# Altium PCB BAILEY.PcbDoc (part 7 of 8)
Units mil, origin at the board's own origin, x right, y up, seen from the top; angles counter-clockwise.
Board outline 4500 x 4000 mil, 4 copper layers (Signal Layer 1, Signal Layer 2, Signal Layer 3, Signal Layer 4), stack 59.904 mil thick; 190 components, 117 nets, 664 pads, 291 vias.
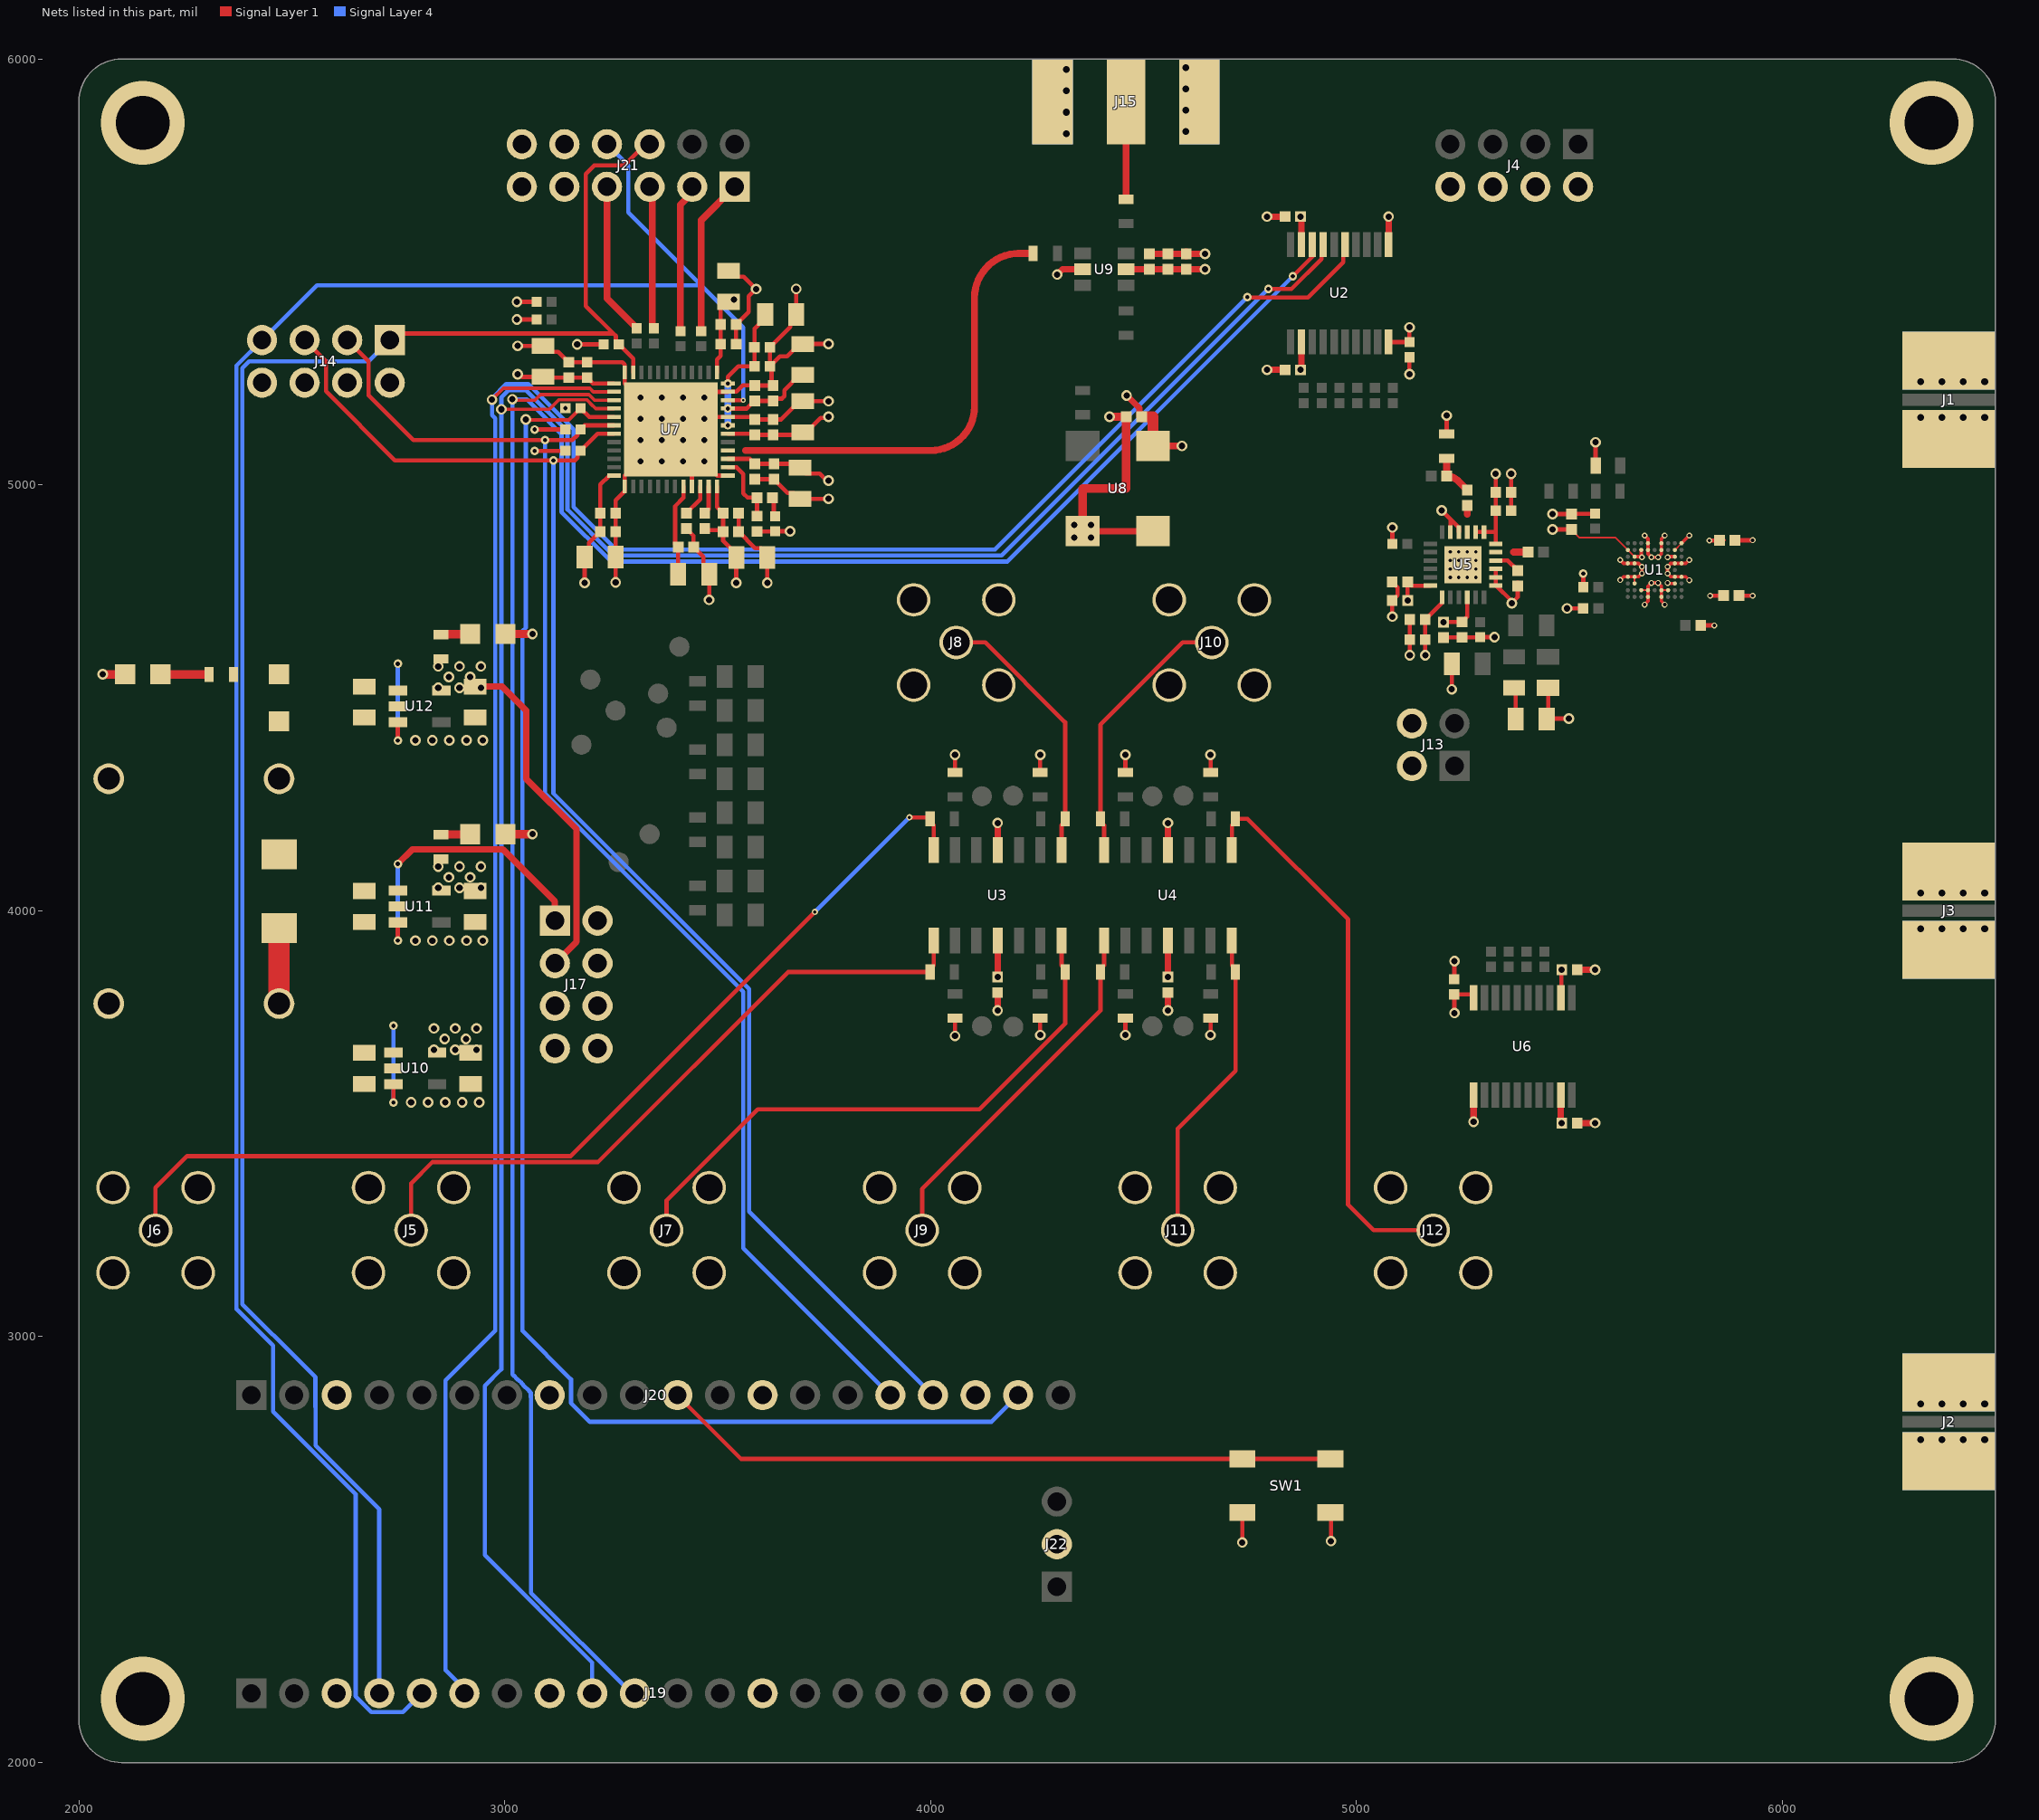
[diagram p4: the nets of this part, all layers, seen from the top]

## Part data (continued)
U11: "1-A, low-IQ high-accuracy low-dropout (LDO) voltage regulator with enable 5-SOT-23 -40 to 125", Case/Package=SOT-23, Dropout Voltage=650mV, Manufacturer="Texas Instruments", Manufacturer Lifecycle Status=ACTIVE, Max Junction Temperature (Tj)=125°C, Max Supply Voltage=5.5V, Min Operating Temperature=-40°C, Min Supply Voltage=1.45V, Nominal Supply Current=25µA, Output Current="1 A", Output Voltage="1.8 V", Supplier Part Number=296-50413-1-ND, Accuracy=1%, Category="LDO Voltage Regulators", ComponentLink1Description=https://sigma.octopart.com:443/177332311/technical_drawing/Texas-Instruments-TLV75718PDBVR.pdf?src-supplier=Texas+Instruments, ComponentLink1URL=https://sigma.octopart.com:443/177332311/technical_drawing/Texas-Instruments-TLV75718PDBVR.pdf?src-supplier=Texas+Instruments, ComponentLink2Description=https://octopart.com:443/opatz8j6/c1?t=LNhw8VYZlWpvSgfwSbWwER0C1aFrb4WiDbvbIAGvhxvgQJSu-YTHIYusHOkqrFl1ubYiC7hECb41naNFPdUxKtCiz9_QYZXvTPuT2kWWY7P1iaj_9VuZ0VXU-pOF7midcWATfFw5vckxfwAqZx9Q2ej4q7wKDFH9Xtp9E58D2pRmx7nz-A2MSPhDRcBhv6VVNe5pwxWdv5qqQWIE0Ip5EXAq_TZ793t-Km77zPzDy5oRrzSJqtrEGO8Rg9L3KNyczjw3CqQXp4IaldJF9NwqSrhLVRVV24aJWYeWxK7QEZ1zbLdzfLHpUNGWUx5BArHk98TBn7whuhePb0udLY4hessARU-N37P82AGNs8v-R6eVBy-k_l2R0DXlJserTyRNxdjxCkw&src-supplier=Texas+Instruments, ComponentLink2URL=https://octopart.com:443/opatz8j6/c1?t=LNhw8VYZlWpvSgfwSbWwER0C1aFrb4WiDbvbIAGvhxvgQJSu-YTHIYusHOkqrFl1ubYiC7hECb41naNFPdUxKtCiz9_QYZXvTPuT2kWWY7P1iaj_9VuZ0VXU-pOF7midcWATfFw5vckxfwAqZx9Q2ej4q7wKDFH9Xtp9E58D2pRmx7nz-A2MSPhDRcBhv6VVNe5pwxWdv5qqQWIE0Ip5EXAq_TZ793t-Km77zPzDy5oRrzSJqtrEGO8Rg9L3KNyczjw3CqQXp4IaldJF9NwqSrhLVRVV24aJWYeWxK7QEZ1zbLdzfLHpUNGWUx5BArHk98TBn7whuhePb0udLY4hessARU-N37P82AGNs8v-R6eVBy-k_l2R0DXlJserTyRNxdjxCkw&src-supplier=Texas+Instruments, ComponentLink3Description=https://sigma.octopart.com:443/175570406/technical_drawing/Texas-Instruments-TLV75718PDBVR.pdf?src-supplier=Texas+Instruments, ComponentLink3URL=https://sigma.octopart.com:443/175570406/technical_drawing/Texas-Instruments-TLV75718PDBVR.pdf?src-supplier=Texas+Instruments, ComponentLink4Description=https://sigma.octopart.com:443/169406034/technical_drawing/Texas-Instruments-TLV75718PDBVR.pdf?src-supplier=Texas+Instruments, ComponentLink4URL=https://sigma.octopart.com:443/169406034/technical_drawing/Texas-Instruments-TLV75718PDBVR.pdf?src-supplier=Texas+Instruments, ComponentLink5Description=https://sigma.octopart.com:443/155939316/technical_drawing/Texas-Instruments-TLV75718PDBVR.pdf?src-supplier=Texas+Instruments, ComponentLink5URL=https://sigma.octopart.com:443/155939316/technical_drawing/Texas-Instruments-TLV75718PDBVR.pdf?src-supplier=Texas+Instruments, ComponentLink6Description=https://sigma.octopart.com:443/102331370/technical_drawing/Texas-Instruments-TLV75718PDBVR.pdf?src-supplier=Texas+Instruments, ComponentLink6URL=https://sigma.octopart.com:443/102331370/technical_drawing/Texas-Instruments-TLV75718PDBVR.pdf?src-supplier=Texas+Instruments, ComponentLink7Description=https://datasheet.octopart.com:443/TLV75718PDBVR-Texas-Instruments-datasheet-151190461.pdf?src-supplier=Upverter, ComponentLink7URL=https://datasheet.octopart.com:443/TLV75718PDBVR-Texas-Instruments-datasheet-151190461.pdf?src-supplier=Upverter, ComponentLink8Description=https://datasheet.octopart.com:443/TLV75718PDBVR-Texas-Instruments-datasheet-164419132.pdf?src-supplier=Augswan, ComponentLink8URL=https://datasheet.octopart.com:443/TLV75718PDBVR-Texas-Instruments-datasheet-164419132.pdf?src-supplier=Augswan, ComponentLink9Description=https://datasheet.octopart.com:443/TLV75718PDBVR-Texas-Instruments-datasheet-165804641.pdf?src-supplier=LCSC, ComponentLink9URL=https://datasheet.octopart.com:443/TLV75718PDBVR-Texas-Instruments-datasheet-165804641.pdf?src-supplier=LCSC, ComponentLink10Description=https://datasheet.octopart.com:443/TLV75718PDBVR-Texas-Instruments-datasheet-159117837.pdf?src-supplier=LCSC, ComponentLink10URL=https://datasheet.octopart.com:443/TLV75718PDBVR-Texas-Instruments-datasheet-159117837.pdf?src-supplier=LCSC, ComponentLink11Description=http://sigma.octopart.com:80/reach_statement/Texas-Instruments-company-64.pdf?src-supplier=Compliance+Statements, ComponentLink11URL=http://sigma.octopart.com:80/reach_statement/Texas-Instruments-company-64.pdf?src-supplier=Compliance+Statements, ComponentLink12Description=http://sigma.octopart.com:80/conflict_mineral_statement/Texas-Instruments-company-63.pdf?src-supplier=Compliance+Statements, ComponentLink12URL=http://sigma.octopart.com:80/conflict_mineral_statement/Texas-Instruments-company-63.pdf?src-supplier=Compliance+Statements, Height=1.45mm, Length=2.9mm, Lifecycle Status=Production, Manufacturer Part Number=TLV75718PDBVR, Max Operating Temperature=125°C, Number of Channels=1, Number of Outputs=1, Pins=5, Pricing="1=0.33, 10=0.229, 25=0.2032, 100=0.1751, 250=0.16168, 500=0.15358, 1000=0.14692 (USD)", RoHS=Compliant, Schedule B="8542390000, 8542390000|8542390000|8542390000|8542390000|8542390000", Stock=12647, Supplier=DigiKey, Thickness=1.2mm, Width=1.6mm
U12: "1-A, low-IQ high-accuracy low-dropout (LDO) voltage regulator with enable 5-SOT-23 -40 to 125", Case/Package=SOT-23, Dropout Voltage=1.35V, Manufacturer="Texas Instruments", Manufacturer Lifecycle Status=ACTIVE, Max Junction Temperature (Tj)=125°C, Max Supply Voltage=5.5V, Min Operating Temperature=-40°C, Min Supply Voltage=1.45V, Output Current="1 A", Output Voltage="3.3 V", Supplier Part Number=296-50414-1-ND, Accuracy=1%, Category="LDO Voltage Regulators", ComponentLink1Description=https://sigma.octopart.com:443/177332311/technical_drawing/Texas-Instruments-TLV75733PDBVR.pdf?src-supplier=Texas+Instruments, ComponentLink1URL=https://sigma.octopart.com:443/177332311/technical_drawing/Texas-Instruments-TLV75733PDBVR.pdf?src-supplier=Texas+Instruments, ComponentLink2Description=https://octopart.com:443/opatz8j6/c1?t=o_IEZOOxq13ZapM8h6eyVu6U4w7uJ0lOpdn1eQGus_LxPlF5140NiI_IzcwdUYrJ31K3ZwQ0inlTMb17Fre9UGVV-cyueG3giZtsqNdfBTaDvWHPrUnuYqbjGGi1Ds2698qqLwV3Tlrub6HkjX8UNxdzrCQv7HZbxbhh4yUVoxpAQ1qsH8ZXaPiP3z0geKqV9LoOfem8uzwcPRQneIzB8HlYy48TGA3XJ2QdRU4asiXFDExmiO-kVw1cCOAyjCAZDaRc6pkHeHkCvnc9-OsSmWRnTJK9cYXxUvWANDQacA2frlSUhGVJAUMlyqJStMqs6xJQSWGFCunWce9bwDnK-mHRtMdijleQcFxXiu3YZMz3tjqIGqvB3GT98ijRk5E9binYeYc&src-supplier=Texas+Instruments, ComponentLink2URL=https://octopart.com:443/opatz8j6/c1?t=o_IEZOOxq13ZapM8h6eyVu6U4w7uJ0lOpdn1eQGus_LxPlF5140NiI_IzcwdUYrJ31K3ZwQ0inlTMb17Fre9UGVV-cyueG3giZtsqNdfBTaDvWHPrUnuYqbjGGi1Ds2698qqLwV3Tlrub6HkjX8UNxdzrCQv7HZbxbhh4yUVoxpAQ1qsH8ZXaPiP3z0geKqV9LoOfem8uzwcPRQneIzB8HlYy48TGA3XJ2QdRU4asiXFDExmiO-kVw1cCOAyjCAZDaRc6pkHeHkCvnc9-OsSmWRnTJK9cYXxUvWANDQacA2frlSUhGVJAUMlyqJStMqs6xJQSWGFCunWce9bwDnK-mHRtMdijleQcFxXiu3YZMz3tjqIGqvB3GT98ijRk5E9binYeYc&src-supplier=Texas+Instruments, ComponentLink3Description=https://sigma.octopart.com:443/175570406/technical_drawing/Texas-Instruments-TLV75733PDBVR.pdf?src-supplier=Texas+Instruments, ComponentLink3URL=https://sigma.octopart.com:443/175570406/technical_drawing/Texas-Instruments-TLV75733PDBVR.pdf?src-supplier=Texas+Instruments, ComponentLink4Description=https://sigma.octopart.com:443/169406034/technical_drawing/Texas-Instruments-TLV75733PDBVR.pdf?src-supplier=Texas+Instruments, ComponentLink4URL=https://sigma.octopart.com:443/169406034/technical_drawing/Texas-Instruments-TLV75733PDBVR.pdf?src-supplier=Texas+Instruments, ComponentLink5Description=https://sigma.octopart.com:443/155939316/technical_drawing/Texas-Instruments-TLV75733PDBVR.pdf?src-supplier=Texas+Instruments, ComponentLink5URL=https://sigma.octopart.com:443/155939316/technical_drawing/Texas-Instruments-TLV75733PDBVR.pdf?src-supplier=Texas+Instruments, ComponentLink6Description=https://sigma.octopart.com:443/102331370/technical_drawing/Texas-Instruments-TLV75733PDBVR.pdf?src-supplier=Texas+Instruments, ComponentLink6URL=https://sigma.octopart.com:443/102331370/technical_drawing/Texas-Instruments-TLV75733PDBVR.pdf?src-supplier=Texas+Instruments, ComponentLink7Description=https://datasheet.octopart.com:443/TLV75733PDBVR-Texas-Instruments-datasheet-164419132.pdf?src-supplier=Augswan, ComponentLink7URL=https://datasheet.octopart.com:443/TLV75733PDBVR-Texas-Instruments-datasheet-164419132.pdf?src-supplier=Augswan, ComponentLink8Description=https://datasheet.octopart.com:443/TLV75733PDBVR-Texas-Instruments-datasheet-165804641.pdf?src-supplier=LCSC, ComponentLink8URL=https://datasheet.octopart.com:443/TLV75733PDBVR-Texas-Instruments-datasheet-165804641.pdf?src-supplier=LCSC, ComponentLink9Description=https://datasheet.octopart.com:443/TLV75733PDBVR-Texas-Instruments-datasheet-159117837.pdf?src-supplier=LCSC, ComponentLink9URL=https://datasheet.octopart.com:443/TLV75733PDBVR-Texas-Instruments-datasheet-159117837.pdf?src-supplier=LCSC, ComponentLink10Description=http://sigma.octopart.com:80/reach_statement/Texas-Instruments-company-64.pdf?src-supplier=Compliance+Statements, ComponentLink10URL=http://sigma.octopart.com:80/reach_statement/Texas-Instruments-company-64.pdf?src-supplier=Compliance+Statements, ComponentLink11Description=http://sigma.octopart.com:80/conflict_mineral_statement/Texas-Instruments-company-63.pdf?src-supplier=Compliance+Statements, ComponentLink11URL=http://sigma.octopart.com:80/conflict_mineral_statement/Texas-Instruments-company-63.pdf?src-supplier=Compliance+Statements, Height=1.45mm, Length=2.9mm, Lifecycle Status=Production, Manufacturer Part Number=TLV75733PDBVR, Max Operating Temperature=125°C, Number of Channels=1, Number of Outputs=1, Pins=5, Pricing="1=0.33, 10=0.229, 25=0.2032, 100=0.1751, 250=0.16168, 500=0.15358, 1000=0.14692 (USD)", RoHS=Compliant, Schedule B="8542390000, 8542390000|8542390000|8542390000|8542390000|8542390000", Stock=9339, Supplier=DigiKey, Thickness=1.2mm, Width=1.6mm

## Via types
v1: diameter 25, hole 15, Signal Layer 1 to Signal Layer 4, 128 vias
v2: diameter 13.78, hole 7.87, Signal Layer 1 to Signal Layer 4, tented both sides, 41 vias
v3: diameter 20, hole 10, Signal Layer 1 to Signal Layer 4, 39 vias
v4: diameter 15, hole 8, Signal Layer 1 to Signal Layer 4, 27 vias
v5: diameter 16.14, hole 16.14, Signal Layer 1 to Signal Layer 4, 24 vias
v6: diameter 23.62, hole 13.78, Signal Layer 1 to Signal Layer 4, tented both sides, 16 vias
v7: diameter 16, hole 16, Signal Layer 1 to Signal Layer 4, 8 vias
v8: diameter 196.85, hole 125.98, Signal Layer 1 to Signal Layer 4, 4 vias
v9: diameter 18, hole 10, Signal Layer 1 to Signal Layer 4, 2 vias
v10: diameter 11, hole 6, Signal Layer 1 to Signal Layer 4, 1 vias
v11: diameter 16, hole 8, Signal Layer 1 to Signal Layer 4, 1 vias

## Nets (pads, with @x,y where several pads share a name; then routed paths per layer and width w, separated by ;. In a path a pad name is that pad's centre, name@x,y a point inside that pad or via, vN(x,y) a via of type N, cw(c..) or ccw(c..) an arc to the next point about the centre after c; other vN are vias at no path point)
1V5: C1.2 C2.2 C3.2 C7.1 C75.2 J17.4 R1.2 R11.1 U1.B1 U1.B3 U1.C2 U1.C8 U1.G8 U2.2 U2.10 U10.5 | length 538.7
  Signal Layer 1 w4: C1.2@5504.56,4895.46 5523.9,4876.12 5608.13,4876.12 U1.B1@5637.01,4847.24 U1.C2@5652.76,4831.5 ; v2(5730.13,4769.87) ccw(c5733.42,4773.16) v2@5733.42,4768.5 ; v2(5730.13,4830.13) cw(c5733.42,4826.84) v2@5733.42,4831.5
  Signal Layer 1 w8: U1.C2@5652.76,4831.5 5666.57,4831.5 cw(c5666.57,4826.84) v2(5669.86,4830.13) cw(c5673.14,4833.41) 5668.5,4833.41 U1.B3@5668.5,4847.24 ; v2@5733.42,4768.5 U1.G8@5747.24,4768.5 ; v2@5733.42,4831.5 U1.C8@5747.24,4831.5
  Signal Layer 1 w10: v1(4868.11,5270) C7.1@4869.27,5271.16 ; U2.10@5075.16,5335.83 5075.94,5335.04 R11.1@5124.19,5335.04 v1(5124.19,5370) ; v1(5460,4895.47) C1.2@5504.56,4895.46 ; R1.2@5532.28,4760 v3(5532.28,4791.57) ; v2(5828.6,4869.4) 5860.97,4869.4 C2.2@5861.73,4870.16 ; v2(5830.12,4740) C3.2@5861.89,4740
  Signal Layer 1 w15: v1(4868.11,5270) 4870.43,5272.32 U2.2@4870.43,5335.83
  other v1: 2833.72,3673.72 2883.72,3673.72 2933.72,3673.72 2858.72,3698.72 2908.72,3698.72 2833.72,3723.72 2883.72,3723.72 2933.72,3723.72
1V8: C13.2 C16.2 C19.2 C20.2 C23.1 C77.2 J17.3 R28.2 R37.1 R55.1 U5.18 U5.19 U6.2 U6.10 U11.5 | length 452.9
  Signal Layer 1 w10: R28.2@5084,4861.47 v1(5084,4900) ; v1(5119.83,4728.66) C19.2@5119.83,4771.86 5128.35,4763.34 U5.18@5173.23,4763.34 ; v1(5161.2,4599.78) C16.2@5161.2,4636.8 C13.2@5161.2,4683.71 5200.37,4722.89 5200.37,4735.36 U5.19@5200.79,4735.78 ; v1(5230,3760) 5229.58,3760.42 5229.58,3803.14 R37.1@5229.15,3803.57 5270.98,3803.57 5274.84,3799.71 U6.10@5274.84,3795.85 ; U6.2@5479.57,3795.85 5480.73,3797.01 5480.73,3860.52 v1(5481.89,3861.68)
  other v1: 2843.72,4053.72 2893.72,4053.72 2943.72,4053.72 2868.72,4078.72 2918.72,4078.72 2843.72,4103.72 2893.72,4103.72 2943.72,4103.72
3V3: C8.2 C9.1 C10.1 C11.2 C12.2 C21.2 C22.2 C24.2 C28.2 C29.2 C30.2 C31.2 C32.2 C33.2 C34.2 C35.2 C36.2 C38.1 C45.2 C47.2 C49.2 C50.2 C51.2 C52.2 C53.2 C55.2 C56.2 C70.2 C71.2 C72.2 C73.2 C79.2 J17.2 J21.6 J21.12 R41.2 R42.2 R43.2 R44.2 R45.2 R54.1 U2.19 U3.4 U4.4 U5.6 U5.7 U5.8 U5.22 U6.19 U7.12 U7.15 U7.18 U7.25 U7.37 U7.48 U8.1 U8.4 U9.5 U12.5 | length 3937.7
  Signal Layer 1 w10: v1(3028.41,5388.38) R45.2@3074.57,5388.38 ; v1(3030,5260) 3034.06,5260 3040.48,5253.58 C50.2@3090,5253.58 3091.69,5251.89 C51.2@3150,5251.89 C52.2@3193.2,5251.89 3206.82,5238.27 U7.37@3256.24,5238.27 ; v3(3070,5080) R43.2@3142.28,5080 ; v3(3070,5130) R42.2@3142.28,5130 ; v1(3170,5330) R41.2@3232.28,5330 ; v1(3187.48,4770) C28.2@3187.48,4830.46 3197.78,4840.76 3197.78,4864.1 C29.2@3224.09,4890.41 C30.2@3224.09,4933.61 3224.09,5000.71 ; 3224.19,5000.62 3245.3,5021.73 U7.48@3256.24,5021.73 ; C38.1@3469.65,4897.39 3473.13,4893.9 3509.35,4893.9 C32.2@3512.84,4890.41 ; U7.12@3498.27,4996.24 3498.27,4948.18 C33.2@3512.84,4933.61 C32.2@3512.84,4890.41 ; U7.25@3498.27,5263.76 3498.36,5263.85 3498.36,5294.36 3506.88,5302.88 C49.2@3506.88,5330.48 C47.2@3506.88,5376.53 3506.88,5416.02 3520.58,5429.72 C45.2@3524.99,5429.72 3530.5,5435.23 v1(3538.55,5435.23) ; U7.15@3523.76,5061.1 3575.14,5061.1 C56.2@3586.83,5049.42 C55.2@3632.03,5049.42 3683.47,5049.42 C53.2@3692.84,5040.05 3706.54,5026.35 3739.59,5026.35 3755.94,5010 v1(3760,5010) ; U7.18@3523.76,5120.16 3523.85,5120.06 3584.25,5120.06 C36.2@3586.92,5117.39 C35.2@3630.12,5117.39 3682.16,5117.39 C34.2@3691.66,5126.89 ; v1(3543.58,4770) C31.2@3543.58,4830 3543.58,4837.87 3512.84,4868.61 C32.2@3512.84,4890.41 ; C34.2@3700,5123.58 3707.87,5123.58 3741.42,5157.13 3757.13,5157.13 v1(3760,5160) ; v1(4420,5160) v1@4420.1,5159.9 ; C70.2@4458.99,5159.9 C70.2@4459.09,5159.8 ; v1(4868.11,5630) C8.2@4869.27,5628.84 ; v1(5204.39,4677.81) 5204.54,4677.96 5247.44,4677.96 C21.2@5247.59,4678.11 5259.84,4690.36 U5.22@5259.84,4735.78 ; U5.8@5279.53,4889.32 U5.7@5299.21,4889.32 5326.49,4889.32 5326.77,4889.04 ; U5.6@5326.77,4861.76 5326.77,4889.04 ; v1(5326.77,5025.87) C11.2@5326.77,4982.76 C12.2@5326.77,4939.56 5326.77,4889.04 ; C24.2@5480.73,3502.84 v1(5481.89,3501.68)
  Signal Layer 1 w15: C79.2@2930,4526.42 2993.58,4526.42 3050,4470 3050,4310 3167.99,4192.01 3167.99,3927.02 J17.2@3117.79,3876.82 ; v1(4157.16,3844.23) U3.4@4157.16,3919.82 ; U8.4@4356.73,4891.47 U8.1@4522.09,4891.47 ; U9.5@4458.7,5506.14 C73.2@4513.79,5506.14 C72.2@4556.98,5506.14 C71.2@4600.18,5506.14 v1(4644,5506.14) ; v1(4557.16,3844.23) U4.4@4557.16,3919.82 ; v1(4868.11,5630) 4870.43,5627.68 U2.19@4870.43,5564.17 ; U6.19@5479.57,3567.51 5479.57,3504 C24.2@5480.73,3502.84
  Signal Layer 1 w20: U8.4@4356.73,4891.47 4356.73,4991.47 4459.09,4991.47 C70.2@4459.09,5159.8 ; v1@4420.1,5159.9 C70.2@4458.99,5159.9
  other v1: 2843.72,4523.72 2893.72,4523.72 2943.72,4523.72 2868.72,4548.72 2918.72,4548.72 2843.72,4573.72 2893.72,4573.72 2943.72,4573.72 4336.8,4876.3 4376.8,4876.3 4336.8,4906.3 4376.8,4906.3
  other v3: 3142.28,5180
5V_IN: C74.2 C76.2 C78.2 D1.2 J17.1 R53.1 U10.1 U10.3 U11.1 U11.3 U12.1 U12.3 | length 1147
  Signal Layer 1 w10: v3(2738.82,3550) U10.3@2738.82,3592.6 ; v3(2748.82,3930) U11.3@2748.82,3972.6 ; v3(2748.82,4400) U12.3@2748.82,4442.6
  Signal Layer 1 w15: v3(2748.82,4110) 2783.24,4144.42 2995.58,4144.42 3117.79,4022.21 J17.1@3117.79,3976.82
  Signal Layer 4 w10: v3(2738.82,3550) v3(2738.82,3730) ; v3(2748.82,3930) v3(2748.82,4110) ; v3(2748.82,4400) v3(2748.82,4580)
ADC_CONV_START_N: J14.1 J19.4 J21.9 R41.1 U7.35 | length 4840.1
  Signal Layer 1 w10: J14.1@2730,5340 2745.41,5355.41 3254.59,5355.41 ; U7.35@3301.42,5263.76 3301.42,5296.3 R41.1@3267.72,5330 3260.91,5336.81 3260.91,5349.09 3254.59,5355.41 ; J21.9@3340,5800 3330,5800 3280,5750 3210,5750 3190,5730 3190,5420 3254.59,5355.41
  Signal Layer 4 w10: J19.4@2705.31,2162.69 2705.31,2594.69 2555.97,2744.03 2555.97,2834.03 2555.46,2834.54 2555.46,2904.54 2527.89,2932.11 2384,3076 2384,5274 2400,5290 2680,5290 J14.1@2730,5340
ADC_DATA_READY: J14.4 J19.5 J21.10 U7.22 | length 5369.1
  Signal Layer 1 w10: U7.22@3523.76,5198.9 v10(3560,5198.9)
  Signal Layer 4 w10: J19.5@2805.31,2162.69 2760.87,2118.26 2686.9,2118.26 2649.74,2155.42 2649.74,2630.46 2455.89,2824.31 2455.89,2978.87 2370,3064.75 2370,5280 J14.4@2430,5340 2558.86,5468.86 3461.14,5468.86 ; J21.10@3240,5800 3290,5750 3290,5640 3461.14,5468.86 ; v10(3560,5198.9) 3560,5370 3461.14,5468.86
ADC_DOUT0: J21.1 R38.2 | length 371.6
  Signal Layer 1 w16.65: R38.2@3461.14,5361.04 3461.14,5621.14 J21.1@3540,5700
ADC_DOUT1: J21.2 R39.2 | length 350.4
  Signal Layer 1 w16.65: R39.2@3412.37,5361.04 3412.37,5657.7 3440,5685.33 J21.2@3440,5700
ADC_FAULT_N: J14.2 J20.16 R42.1 U7.42 | length 3366.4
  Signal Layer 1 w10: J14.2@2630,5340 2680,5290 2680,5210 2785.04,5104.96 3158.58,5104.96 3170.91,5117.28 3170.91,5123.19 3187.56,5139.84 U7.42@3256.24,5139.84
  Signal Layer 4 w10: v3(3094.75,5104.96) 3094.75,4275.25 3560,3810 3560,3208 J20.16@3905.31,2862.69
ADC_FS_ADC: J21.3 R47.1 | length 336.4
  Signal Layer 1 w16.65: J21.3@3340,5700 3346.51,5693.49 3346.51,5371.2 R47.1@3350,5367.72
ADC_MCLKIN: R51.2 U7.16 | length 1050.9
  Signal Layer 1 w16.65: 3565.82,5080.79 3999.83,5080.79 ccw(c4000,5183.78) 4102.99,5183.78 4102.99,5439.29 cw(c4207.25,5439.29) 4207.25,5543.54 ; 4204.78,5543.54 4207.25,5543.54 ; R51.2@4240.43,5543.54 4207.25,5543.54
ADC_RST_N: J14.3 J20.17 R43.1 U7.43 | length 3479.8
  Signal Layer 1 w10: J14.3@2530,5340 2580,5290 2580,5220 2742.28,5057.72 3165.05,5057.72 3170.91,5063.57 3170.91,5073.19 3217.78,5120.06 3256.15,5120.06 U7.43@3256.24,5120.16
  Signal Layer 4 w10: v3(3114.19,5057.72) 3114.19,4275.81 3574,3816 3574,3294 J20.17@4005.31,2862.69
ADC_SCLK: J21.4 R40.2 | length 361.3
  Signal Layer 1 w16.65: J21.4@3240,5700 3240,5437.72 R40.2@3310,5367.72
ADC_SPI_CLK: J19.9 U2.17 U7.40 | length 5970.6
  Signal Layer 1 w8: v1(2991.81,5177.51) 3104.86,5177.51 3127.16,5199.81 3192.84,5199.81 3197.53,5195.12 3197.53,5194.69 3202.21,5190 3202.65,5190 3213.44,5179.21 U7.40@3256.24,5179.21
  Signal Layer 1 w10: v3(4792.85,5460.16) 4793.01,5460 4847.13,5460 4917.76,5530.63 4917.76,5560.31 U2.17@4921.61,5564.17
  Signal Layer 4 w10: J19.9@3205.31,2162.69 3205.31,2234.89 2953.13,2487.07 2953.13,2884.69 2991.81,2923.37 v1(2991.81,5177.51) 2991.81,5205.4 3008.89,5222.49 3049.71,5222.49 3147.19,5125.01 3147.19,4942.12 3255.31,4834 4166.76,4834 4792.85,5460.09 v3(4792.85,5460.16)
ADC_SPI_CS: J20.19 R44.1 U7.41 | length 3680.5
  Signal Layer 1 w8: v1(3049.43,5153.39) 3050.11,5152.72 3150.43,5152.72 R44.1@3177.72,5180
  Signal Layer 1 w10: R44.1@3177.72,5180 3198.19,5159.53 U7.41@3256.24,5159.53
  Signal Layer 4 w10: v1(3049.43,5153.39) 3049.43,4664.84 3041.52,4656.93 3041.52,3013.85 3155.47,2899.91 3155.47,2844.53 3200,2800 4142.61,2800 J20.19@4205.31,2862.69
ADC_SPI_MISO: J19.6 U2.15 U7.38 | length 6015.1
  Signal Layer 1 w8: v1(2970,5200) 2996.88,5226.88 3199.71,5226.88 3208.01,5218.58 U7.38@3256.24,5218.58
  Signal Layer 1 w10: v3(4743.7,5440.71) 4744.41,5440 4885.76,5440 4968.94,5523.18 4968.94,5560.31 U2.15@4972.8,5564.17
  Signal Layer 4 w10: J19.6@2905.31,2162.69 2905.31,2172.55 2860.87,2216.99 2860.87,2896.92 2977.81,3013.86 2977.81,5156.01 2970,5163.82 v1(2970,5200) 2970,5203.39 3003.09,5236.49 3055.51,5236.49 3161.19,5130.81 3161.19,4947.92 3261.1,4848 4150.99,4848 v3(4743.7,5440.71)
ADC_SPI_MOSI: J19.10 U2.18 U7.39 | length 5879.7
  Signal Layer 1 w8: v1(3017.8,5200.99) 3020.07,5198.71 3070.7,5198.71 3083.99,5212 3197.62,5212 3210.73,5198.9 U7.39@3256.24,5198.9
  Signal Layer 1 w10: v3(4850.32,5490.06) 4896.02,5535.77 U2.18@4896.02,5564.17
  Signal Layer 4 w10: v1(3017.8,5200.99) 3017.8,5200.63 3017.8,2911.63 3020.73,2908.7 3028.67,2900.75 3029.39,2900.03 cw(c3005.31,2862.69) 3042.65,2886.78 3057.97,2871.45 3060.9,2868.52 3060.9,2864.38 3060.9,2864.22 ccw(c3105.31,2862.69) 3061.7,2854.18 cw(c3051.87,2852.31) 3061.87,2852.31 3061.87,2398.13 3297.31,2162.69 J19.10@3305.31,2162.69 ; v1@3018.15,5200.63 3051.76,5200.63 3070.86,5181.53 3133.19,5119.21 3133.19,4936.32 3249.51,4820 4180.26,4820 v3(4850.32,5490.06)
DVDD_4: C39.2 C40.2 C41.2 C42.2 C43.2 C44.2 U7.19 U7.21 U7.24 | length 536.3
  Signal Layer 1 w10: v3(3523.76,5179.21) 3568.6,5179.21 C40.2@3586.76,5197.38 3587.05,5197.09 3629.67,5197.09 C41.2@3629.96,5196.8 3635.75,5202.59 3650.58,5202.59 3656.44,5208.45 3656.44,5222.31 3692.13,5257.99 C39.2@3700,5257.99 ; v3(3523.76,5238.27) 3523.76,5253.76 3548.48,5278.48 C44.2@3586.39,5278.48 3586.35,5278.53 3586.35,5323.02 C43.2@3586.3,5323.07 3586.3,5367.02 3611.44,5392.17 C42.2@3611.44,5400.04
  Signal Layer 4 w15: v3(3523.76,5139.84) v3(3523.76,5179.21) v3(3523.76,5238.27)
GND: C1.1 C2.1 C3.1 C4.1 C5.1 C6.1 C7.2 C8.1 C9.2 C10.2 C11.1 C12.1 C13.1 C16.1 C18.2 C19.1 C20.1 C21.1 C22.1 C23.2 C24.1 C25.2 C26.2 C27.2 C28.1 C29.1 C30.1 C31.1 C32.1 C33.1 C34.1 C35.1 C36.1 C37.1 C39.1 C40.1 C41.1 C42.1 C43.1 C44.1 C45.1 C46.1 C47.1 C48.1 C49.1 C50.1 C51.1 C52.1 C53.1 C55.1 C56.1 C57.1 C70.1 C71.1 C72.1 C73.1 C74.1 C75.1 C76.1 C77.1 C78.1 C79.1 D2.1 D3.2 D4.2 D5.2 J1.2 J2.2 J3.2 J4.5 J4.6 J4.7 J4.8 J5.2 J6.2 J7.2 J8.2 J9.2 J10.2 J11.2 J12.2 J13.3 J13.4 J14.5 J14.6 J14.7 J14.8 J15.2 J17.5 J17.6 J17.7 J17.8 J18.1 J18.2 J19.3 J19.8 J19.13 J19.18 J20.3 J20.8 J20.13 J20.18 J21.5 J21.11 J22.2 R2.1 R11.2 R14.2 R15.2 R16.2 R17.2 R22.2 R23.2 R24.2 R25.2 R29.1 R30.2 R37.2 R46.2 R48.1 SW1.3 SW1.4 U1.A4 U1.A6 U1.A9 U1.B4 U1.B6 U1.B8 U1.D1 U1.D2 U1.D8 U1.D9 U1.F1 U1.F2 U1.F8 U1.F9 U1.G2 U1.H3 U1.H4 U1.H6 U1.H7 U1.J4 U1.J6 U2.11 U3.11 U4.11 U5.1 U5.2 U5.3 U5.10 U5.11 U5.HTAB U6.11 U7.1 U7.9 U7.13 U7.20 U7.23 U7.36 U7.49 U8.2 U9.2 U10.2 U11.2 U12.2 | length 6388.5
  Signal Layer 1 w4: U1.G2@5652.76,4768.5 U1.F2@5652.76,4784.25 ; U1.H3@5668.5,4752.76 U1.H4@5684.25,4752.76 ; U1.H6@5715.75,4752.76 U1.H7@5731.5,4752.76 ; U1.B8@5747.24,4847.24 U1.A9@5762.99,4862.99
  Signal Layer 1 w7.87: v2@5619.14,4776.38 5627.01,4784.25 U1.F1@5637.01,4784.25 U1.F2@5652.76,4784.25 5662.36,4784.25 ; v2@5619.14,4823.62 5627.01,4815.75 U1.D1@5637.01,4815.75 U1.D2@5652.76,4815.75 5662.04,4815.75 ; 5661.99,4784.3 v2(5669.86,4792.17) v2(5669.86,4807.92) 5662.04,4815.75 ; 5661.99,4815.8 5662.04,4815.75 ; 5662.28,4815.75 5662.04,4815.75 ; v2@5676.37,4719.14 5684.25,4727.02 5684.25,4752.76 5684.25,4762.04 ; v2@5676.37,4880.86 5684.25,4872.98 5684.25,4837.64 ; 5684.2,4761.99 5684.25,4762.04 ; 5684.25,4762.28 5684.25,4762.04 ; 5684.3,4838.01 v2(5692.17,4830.13) v2(5707.92,4830.13) 5715.74,4837.96 ; 5715.7,4761.99 v2(5707.82,4769.87) v2(5692.08,4769.87) 5684.25,4762.04 ; 5715.74,4762.36 5715.74,4727.02 v2@5723.62,4719.14 ; 5715.74,4837.72 5715.74,4837.96 ; 5715.79,4838.01 5715.74,4837.96 ; v2@5723.62,4880.86 5715.74,4872.98 5715.74,4837.96 ; 5737.63,4815.75 U1.D8@5747.24,4815.75 U1.D9@5762.99,4815.75 5772.98,4815.75 v2@5780.85,4823.62 ; 5737.72,4784.25 5737.96,4784.25 ; 5738,4784.2 5737.96,4784.25 ; 5738,4815.7 v2(5730.13,4807.83) v2(5730.13,4792.08) 5737.96,4784.25 ; v2@5780.85,4776.38 5772.98,4784.25 U1.F9@5762.99,4784.25 U1.F8@5747.24,4784.25 5737.96,4784.25
  Signal Layer 1 w8: U1.A9@5762.99,4862.99 v2(5781.14,4881.15)
  Signal Layer 1 w10: v1(3028.41,5430) R46.2@3074.57,5430 ; v1(3030,5326.42) C50.1@3090,5326.42 3103.7,5312.72 3125.39,5312.72 C51.1@3150,5288.11 C52.1@3193.2,5288.11 3275.87,5288.11 3281.73,5282.25 U7.36@3281.73,5263.76 3281.83,5263.66 3281.83,5238.17 U7.49@3390,5130 ; v1(3260.31,4770.88) C28.1@3260.31,4830.46 C29.1@3260.31,4890.41 C30.1@3260.31,4933.61 3260.31,4963.88 3281.73,4985.3 U7.1@3281.73,4996.24 3281.83,4996.34 3281.83,5021.83 U7.49@3317.13,5057.13 ; U7.49@3416.6,5103.4 3439.21,5080.79 U7.9@3439.21,4996.24 ; C37.1@3426.45,4897.39 3443.33,4880.5 C48.1@3443.33,4854.19 3466.25,4831.28 3466.25,4803.7 C46.1@3479.95,4790 v1(3479.95,4730) ; U7.49@3466.6,5053.4 3498.17,5021.83 3523.66,5021.83 U7.13@3523.76,5021.73 ; U7.49@3467.13,5207.13 3478.58,5218.58 U7.23@3523.76,5218.58 3523.85,5218.68 3543.82,5218.68 3558.74,5233.6 C40.1@3586.76,5233.6 3587.05,5233.31 C41.1@3629.67,5233.31 ; U7.49@3468.73,5159.53 U7.20@3523.76,5159.53 3523.85,5159.43 3581.1,5159.43 C36.1@3586.92,5153.61 C35.1@3630.12,5153.61 3649.31,5153.61 3692.13,5196.42 C34.1@3700,5196.42 v1(3760,5196.42) ; C45.1@3524.99,5502.55 3538.69,5488.85 3561.15,5488.85 v1(3590,5460) 3572.71,5442.71 3572.71,5406.15 C47.1@3543.1,5376.53 C49.1@3543.1,5330.48 ; C33.1@3549.06,4933.61 C32.1@3549.06,4890.41 ; C32.1@3549.15,4890.5 C32.1@3549.06,4890.41 ; C56.1@3586.83,5013.2 C55.1@3632.03,5013.2 3664.31,4980.92 3679.14,4980.92 C53.1@3692.84,4967.22 v1@3752.54,4967.22 ; C57.1@3592.17,4890.5 C57.1@3592.26,4890.58 3592.46,4890.78 3634.47,4890.78 R48.1@3634.67,4890.98 v1(3670,4890.98) ; v1(3616.42,4770) C31.1@3616.42,4830 3616.42,4837.87 3602.72,4851.57 3587.9,4851.57 C32.1@3549.06,4890.41 ; C43.1@3622.52,5323.07 3670.58,5371.13 3670.58,5386.34 C42.1@3684.28,5400.04 v1(3684.28,5460.04) ; C43.1@3622.57,5323.02 C44.1@3622.61,5278.48 C44.1@3622.61,5278.48 ; C41.1@3629.96,5233.02 C41.1@3629.67,5233.31 ; v1(3760,5330.83) C39.1@3700,5330.83 3692.13,5330.83 3662.9,5301.6 3645.74,5301.6 C44.1@3622.61,5278.48 ; v1(4057.16,3706.12) R14.2@4057.16,3747.58 ; R15.2@4057.16,4324.66 v1(4057.16,4366.12) ; v1(4257.16,3708.12) R16.2@4257.16,3747.58 ; R17.2@4257.16,4324.66 v1(4257.16,4366.12) ; v1(4457.16,3708.12) R22.2@4457.16,3747.58 ; R23.2@4457.16,4324.66 v1(4457.16,4366.12) ; v1(4657.16,3708.12) R24.2@4657.16,3747.58 ; R25.2@4657.16,4324.66 v1(4657.16,4366.12) ; v1@4731.46,2516.73 v1@4731.6,2516.87 ; v1(4731.6,2516.73) v1@4731.6,2516.87 ; SW1.4@4731.6,2587.01 v1@4731.6,2516.87 ; SW1.3@4938.3,2587.01 4940,2585.3 v1(4940,2520) ; C20.1@5083.61,4728.66 5096.21,4741.26 5096.21,4759.26 C19.1@5083.61,4771.86 ; C20.1@5083.83,4732.39 5083.83,4690.96 v1(5084.05,4690.73) v1@5088.11,4690.73 ; v1(5124.19,5260) R11.2@5124.19,5299.61 ; v1(5124.98,4599.78) C16.1@5124.98,4636.8 C13.1@5124.98,4683.71 ; v1(5200,4940) 5200,4939.81 5240.16,4899.66 U5.10@5240.16,4889.32 ; C22.1@5204.39,4641.59 5204.54,4641.74 5247.44,4641.74 C21.1@5247.59,4641.89 5247.79,4642.09 5289.8,4642.09 R30.2@5290,4642.28 v1(5323.78,4642.28) ; R29.1@5211.53,5119.33 v1(5211.53,5162.82) ; U5.11@5220.47,4889.32 5220.47,4919.53 ; v1(5223.58,4520) C25.2@5223.58,4580 ; R37.2@5229.15,3839 5229.58,3839.43 5229.58,3881.26 v1(5230,3881.68) ; U5.1@5326.77,4763.34 U5.2@5326.77,4783.02 U5.3@5326.77,4802.71 ; U5.1@5327.93,4763.34 5363.49,4727.78 5363.49,4723.25 v1(5364.45,4722.29) 5378.39,4736.24 C18.2@5378.39,4762.55 ; C12.1@5362.99,4939.56 C11.1@5362.99,4982.76 v1(5362.99,5025.87) ; C27.2@5446.42,4450 C27.2@5447.83,4451.41 ; C26.2@5450,4523.58 5450,4453.58 C27.2@5447.83,4451.41 ; v1(5460,4931.69) C1.1@5504.56,4931.69 5505.07,4932.2 5559.48,4932.2 R2.1@5560,4932.72 ; v1(5493.91,4710) C5.1@5531.89,4710 ; v1(5498.59,4451.41) C27.2@5447.83,4451.41 ; C6.1@5561.26,5045 v1(5561.26,5100) ; C4.1@5808.11,4670 v2(5840,4670) ; C3.1@5898.11,4740 v2(5930,4740) ; C2.1@5898.11,4870 v2(5930,4870) ; C44.1@3622.61,5278.48 3626.29,5274.81 3626.29,5236.7 C41.1@3629.67,5233.31
  Signal Layer 1 w15: v1(4157.16,3766.12) C9.2@4157.16,3808.01 ; U3.11@4157.16,4142.42 v1(4157.16,4206.12) ; v1(4297.18,5493.9) 4309.42,5506.14 U9.2@4356.73,5506.14 ; v1(4460,5210) 4490.21,5179.79 4490.21,5164.89 C70.1@4495.31,5159.8 ; C73.1@4513.79,5542.36 C72.1@4556.98,5542.36 C71.1@4600.18,5542.36 v1(4644,5542.36) ; U8.2@4522.09,5091.47 v1(4590,5091.47) ; v1(4557.16,3766.12) C10.2@4557.16,3808.01 ; U4.11@4557.16,4142.42 v1(4557.16,4206.12) ; v1(4790,5270) C7.2@4831.89,5270 ; v1(4790,5630) C8.1@4831.89,5630 ; U2.11@5075.16,5564.17 v1(5075.16,5630) ; v1(5274.84,3504.53) U6.11@5274.84,3567.51 ; C24.1@5518.11,3501.68 v1(5560,3501.68) ; C23.2@5518.11,3861.68 v1(5560,3861.68)
  Signal Layer 1 w20: v1(2056.18,4555.12) D3.2@2108.66,4555.12 ; D5.2@3001.34,4180 v1(3065,4180) ; D4.2@3003.71,4650 v1@3062.38,4650
  Signal Layer 1 w25: C70.1@4495.31,5159.8 4522.09,5159.8 U8.2@4522.09,5091.47 ; C18.2@5378.39,4762.55 C18.2@5378.49,4762.65
  Signal Layer 1 w50: J18.2@2470,3782 D2.1@2470,3959.39
  other v1: 2780,3550 2820,3550 2860,3550 2900,3550 2940,3550 2790,3930 2830,3930 2870,3930 2910,3930 2948.58,3930 2790,4400 2830,4400 2870,4400 2910,4400 2948.58,4400 3065,4650 3760,4967.22
  other v2: 5676.33,4718.85 5723.57,4718.85 5618.85,4776.43 5781.14,4776.33 5219.91,4782.66 5239.91,4782.66 5259.91,4782.66 5279.91,4782.66 5219.91,4802.66 5239.91,4802.66 5259.91,4802.66 5279.91,4802.66 5219.91,4822.66 5239.91,4822.66 5259.91,4822.66 5279.91,4822.66 5618.85,4823.67 5781.14,4823.57 5219.91,4842.66 5239.91,4842.66 5259.91,4842.66 5279.91,4842.66 5676.42,4881.15 5723.67,4881.15
  other v5: 6324.8,2758.07 6374.8,2758.07 6424.8,2758.07 6474.8,2758.07 6324.8,2841.93 6374.8,2841.93 6424.8,2841.93 6474.8,2841.93 6324.8,3958.07 6374.8,3958.07 6424.8,3958.07 6474.8,3958.07 6324.8,4041.93 6374.8,4041.93 6424.8,4041.93 6474.8,4041.93 6324.8,5158.07 6374.8,5158.07 6424.8,5158.07 6474.8,5158.07 6324.8,5241.93 6374.8,5241.93 6424.8,5241.93 6474.8,5241.93
  other v6: 3318.73,5055.53 3368.73,5055.53 3418.73,5055.53 3468.73,5055.53 3318.73,5105.53 3368.73,5105.53 3418.73,5105.53 3468.73,5105.53 3318.73,5155.53 3368.73,5155.53 3418.73,5155.53 3468.73,5155.53 3318.73,5205.53 3368.73,5205.53 3418.73,5205.53 3468.73,5205.53
  other v7: 4318.7,5825 4598.7,5830 4318.7,5875 4598.7,5880 4318.7,5925 4598.7,5930 4318.7,5975 4598.7,5980
  other v8: 2150,2150 6350,2150 2150,5850 6350,5850
MCU_RESET_7: J20.11 SW1.1 SW1.2 | length 1595
  Signal Layer 1 w10: J20.11@3405.31,2862.69 3555.01,2712.99 SW1.1@4731.6,2712.99 SW1.2@4938.3,2712.99
NetC14_1: C14.1 C15.2 R29.2 | length 101.8
  Signal Layer 1 w16.65: R29.2@5211.53,5062.25 C14.1@5211.53,5020.82 cw(c5211.53,4983.68) 5237.79,5009.94 C15.2@5259.84,4987.89
NetC15_1: C15.1 U5.9 | length 20.6
  Signal Layer 1 w16.65: 5259.84,4931.09 C15.1@5259.84,4951.67
NetC17_1: C17.1 U5.5 | length 34.3
  Signal Layer 1 w16.65: 5368.54,4842.07 C17.1@5402.82,4842.07
NetC18_1: C18.1 U5.4 | length 61.5
  Signal Layer 1 w10: U5.4@5326.77,4822.39 5354.97,4822.39 C18.1@5378.49,4798.87
NetC27_1: C27.1 R32.2 | length 75.1
  Signal Layer 1 w10: R32.2@5370,4523.58 5373.58,4520 C27.1@5373.58,4450
NetC37_2: C37.2 U7.10 | length 76.1
  Signal Layer 1 w10: C37.2@3426.45,4933.61 3458.9,4966.06 U7.10@3458.9,4996.24
NetC38_2: C38.2 U7.11 | length 66.3
  Signal Layer 1 w10: C38.2@3469.65,4933.61 3478.58,4942.54 U7.11@3478.58,4996.24
NetC46_2: C46.2 C48.2 U7.8 | length 217.3
  Signal Layer 1 w10: C46.2@3407.11,4790 C48.2@3407.11,4854.19 3400,4861.3 3400,4950.35 3419.53,4969.88 U7.8@3419.53,4996.24
NetC54_1: C54.1 R48.2 | length 46.3
  Signal Layer 1 w10: C54.1@3628.18,4970 3631.42,4966.75 3631.42,4929.65 R48.2@3634.67,4926.41
NetC54_2: C54.2 C57.2 U7.14 | length 167.9
  Signal Layer 1 w10: U7.14@3523.76,5041.42 3523.85,5041.32 3544.46,5041.32 3560,5025.79 3560,4980 3570,4970 C54.2@3591.96,4970 3592.11,4969.85 3592.11,4926.95 C57.2@3592.26,4926.8
NetD1_1: D1.1 D2.2 J16.1 J16.2
NetD3_1: D3.1 R53.2 | length 114.4
  Signal Layer 1 w20: D3.1@2191.34,4555.12 R53.2@2305.74,4555.12
NetD4_1: D4.1 R54.2 | length 69.3
  Signal Layer 1 w20: R54.2@2850,4648.54 2850.73,4649.27 2917.93,4649.27 D4.1@2918.66,4650
NetD5_1: D5.1 R55.2 | length 69.3
  Signal Layer 1 w20: R55.2@2850,4178.54 2850.73,4179.27 2917.93,4179.27 D5.1@2918.66,4180
NetJ5_1: J5.1 R12.2 U3.1 | length 1611.4
  Signal Layer 1 w10: J5.1@2780,3250 2780,3360 2830,3410 3218.92,3410 3665.04,3856.12 R12.2@3998.61,3856.12 3998.61,3863.01 4007.16,3871.55 U3.1@4007.16,3929.82
NetJ6_1: J6.1 R13.2 U3.14 | length 2357.2
  Signal Layer 1 w10: J6.1@2180,3250 2180,3350 2254,3424 3154.71,3424 v4(3727.99,3997.28) ; v4(3949.96,4219.24) 3995.49,4219.24 R13.2@3998.61,4216.12 3998.61,4209.23 4007.16,4200.69 U3.14@4007.16,4142.42
  Signal Layer 4 w10: v4(3727.99,3997.28) v4(3949.96,4219.24)
NetJ7_1: J7.1 R18.2 U3.7 | length 1376.2
  Signal Layer 1 w10: J7.1@3380,3250 3380,3320.07 3593.62,3533.68 4114.79,3533.68 4315.7,3734.6 R18.2@4315.7,3856.12 4315.7,3863.01 4307.16,3871.55 U3.7@4307.16,3929.82
NetJ8_1: J8.1 R19.2 U3.8 | length 637.1
  Signal Layer 1 w10: J8.1@4060,4630 4128.41,4630 4315.7,4442.7 R19.2@4315.7,4216.12 4315.7,4209.23 4307.16,4200.69 U3.8@4307.16,4142.42
NetJ9_1: J9.1 R20.2 U4.1 | length 856.8
  Signal Layer 1 w10: J9.1@3980,3250 3980,3346.96 4398.61,3765.58 R20.2@4398.61,3856.12 4398.61,3863.01 4407.16,3871.55 U4.1@4407.16,3929.82
NetJ10_1: J10.1 R21.2 U4.14 | length 639.5
  Signal Layer 1 w10: U4.14@4407.16,4142.42 4407.16,4200.69 4398.61,4209.23 R21.2@4398.61,4216.12 4398.61,4437.02 4591.59,4630 J10.1@4660,4630
NetJ11_1: J11.1 R26.2 U4.7 | length 739.6
  Signal Layer 1 w10: J11.1@4580,3250 4580,3488.42 4715.7,3624.12 R26.2@4715.7,3856.12 4715.7,3863.01 4707.16,3871.55 U4.7@4707.16,3929.82
NetJ12_1: J12.1 R27.2 U4.8 | length 1334.2
  Signal Layer 1 w10: U4.8@4707.16,4142.42 4707.16,4200.69 4715.7,4209.23 R27.2@4715.7,4216.12 4743.88,4216.12 4980,3980 4980,3310 5040,3250 J12.1@5180,3250
NetJ15_1: J15.1 R52.2 | length 458.9
  Signal Layer 1 w16.65: R52.2@4458.7,5670.53 J15.1@4458.7,5900 R52.2@4458.7,5670.53